# Altium PCB ATT-Light.PcbDoc
Units mm, origin at the board's own origin, x right, y up, seen from the top; angles counter-clockwise.
Board outline 140.3 x 94.24 mm, 2 copper layers (Top Layer, Bottom Layer); 110 components, 78 nets, 448 pads, 256 vias.
Unrouted connection lines stored in the file: 2.
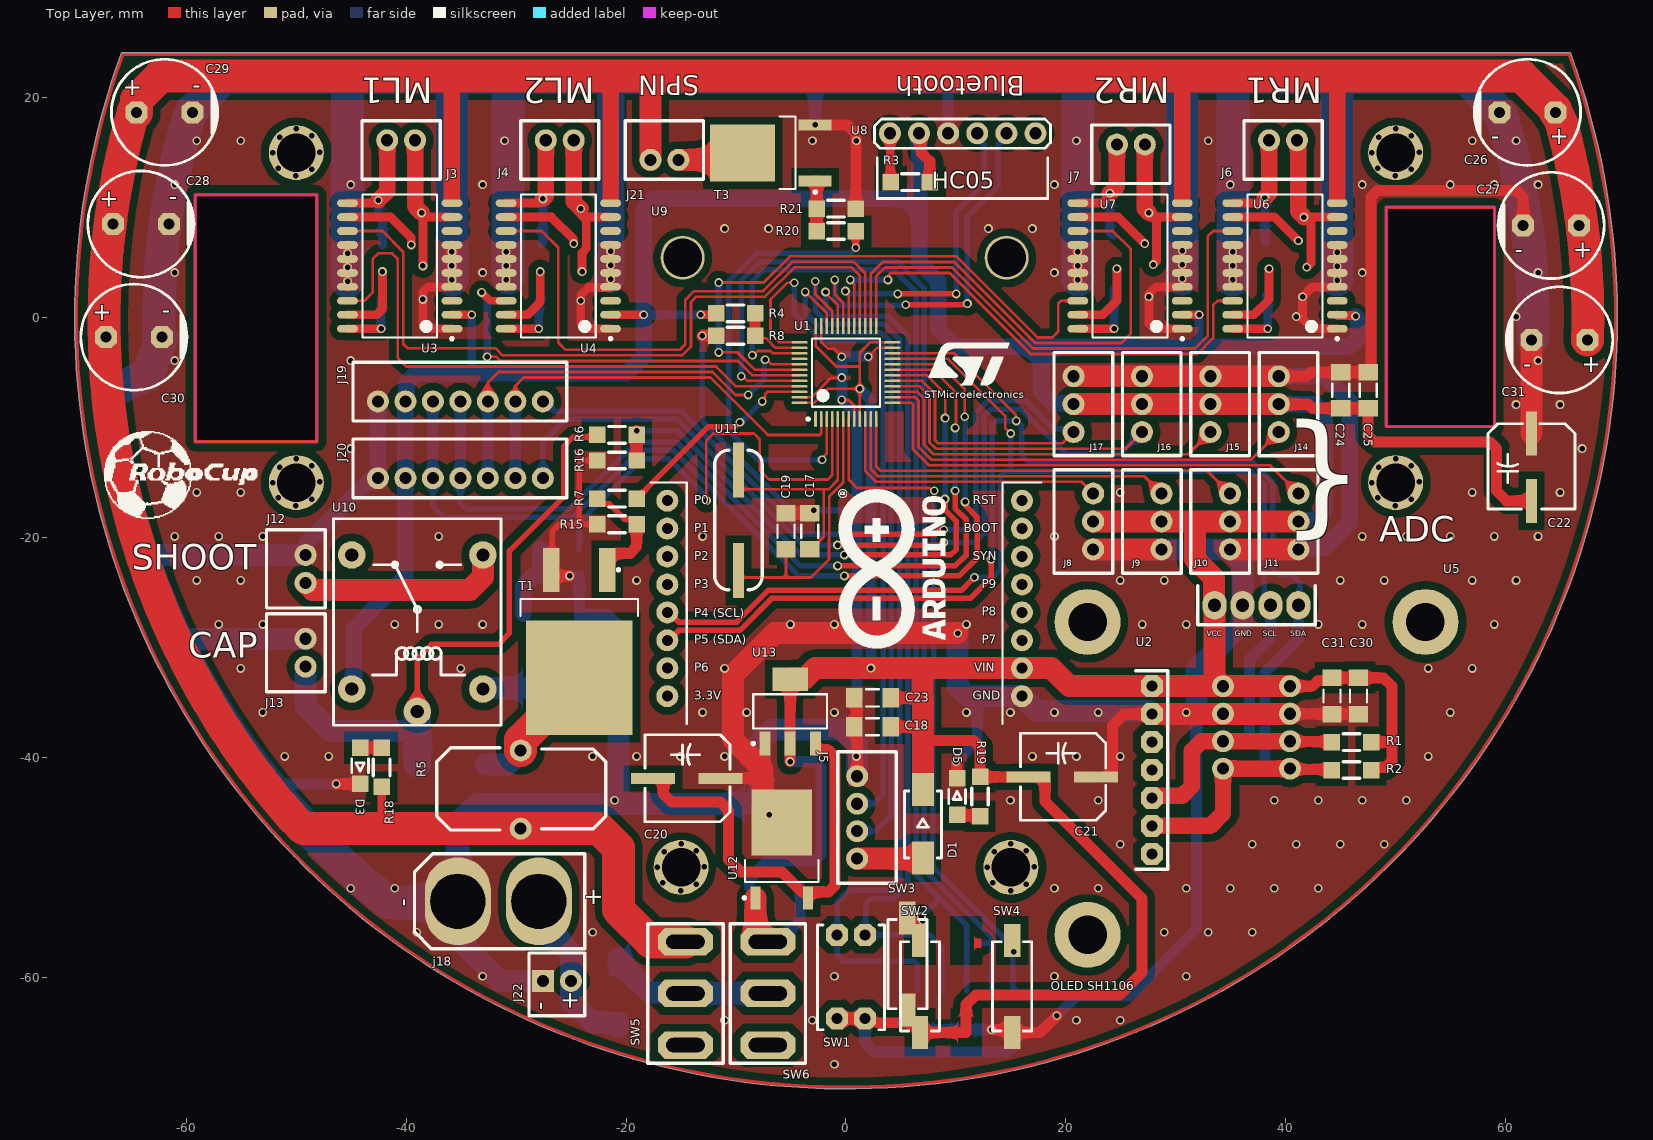
[diagram p0: Top Layer view]
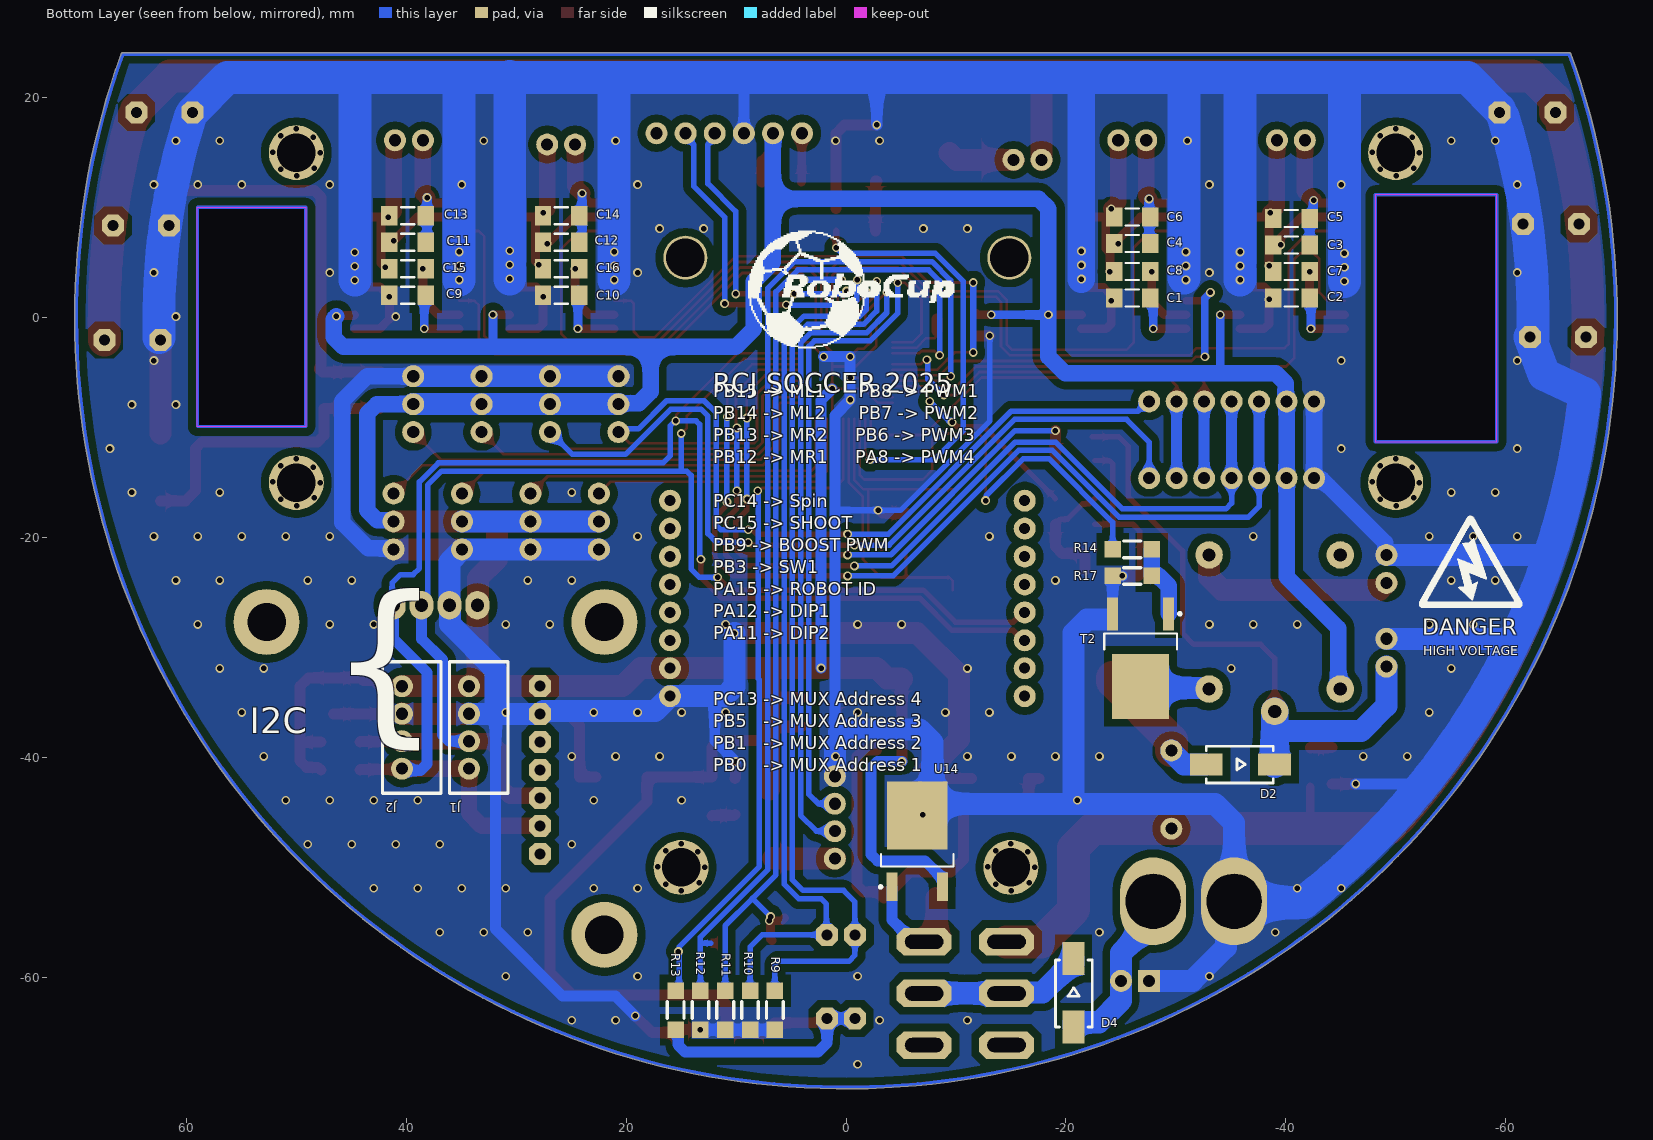
[diagram p1: Bottom Layer view, seen from below]
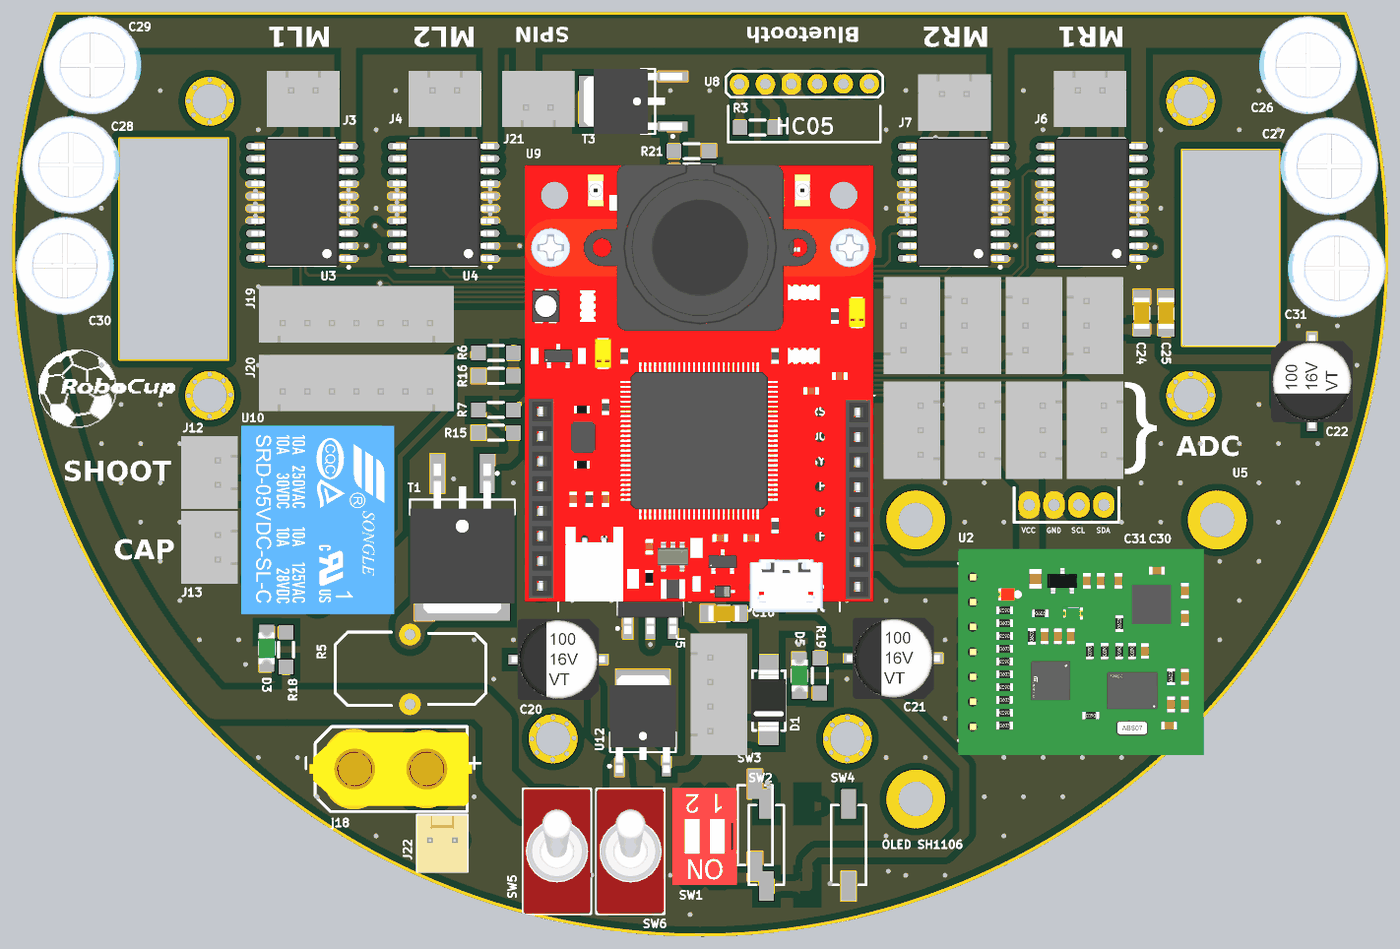
[diagram p2: 3D render of the assembled board from above, using the file's embedded part models]
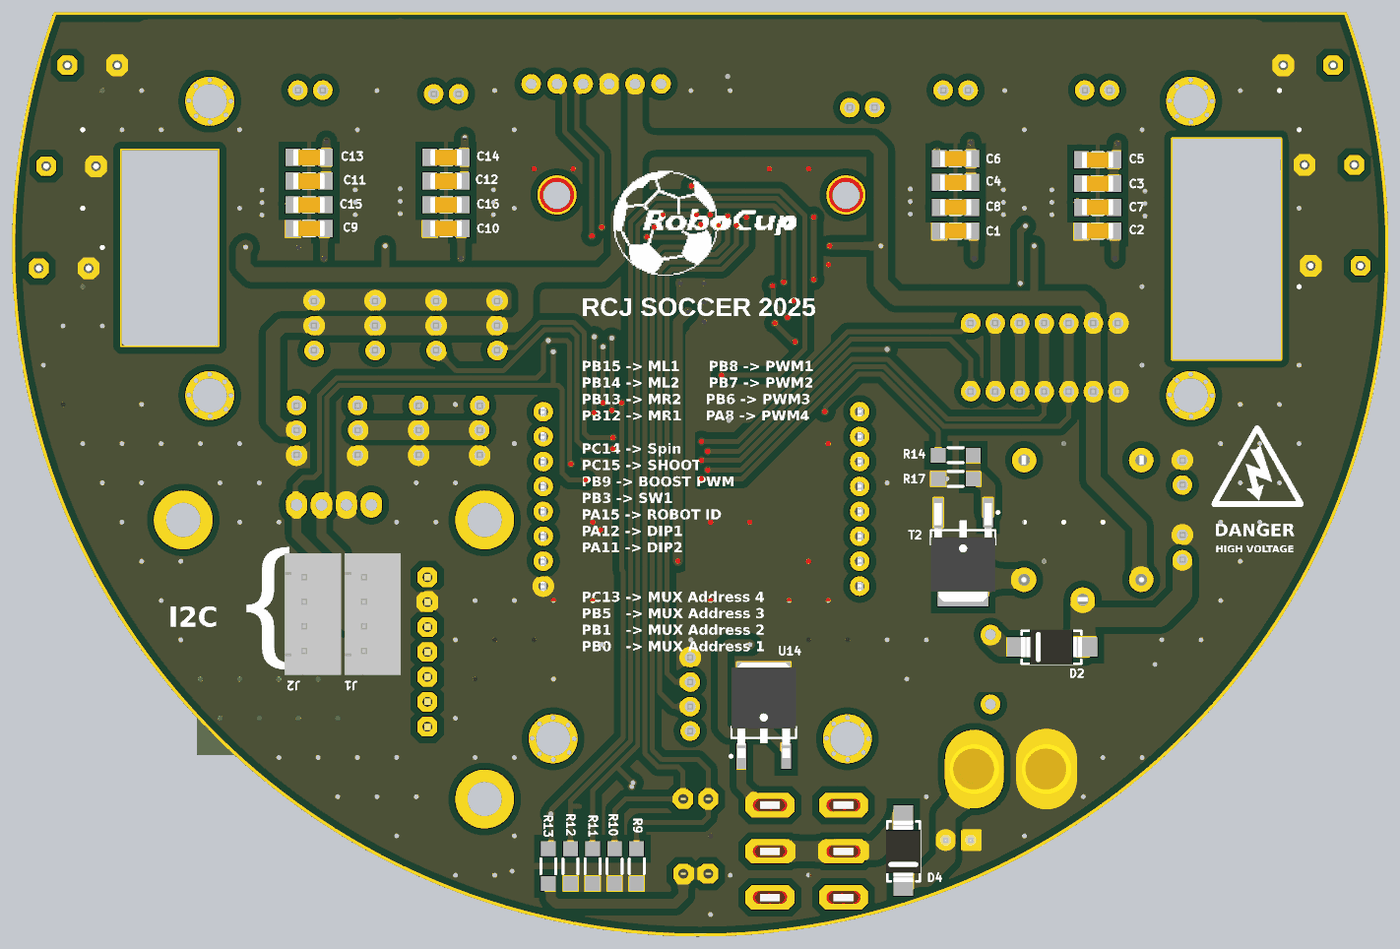
[diagram p3: 3D render of the assembled board from below, using the file's embedded part models]

## Layer stack, top to bottom
Top Solder: solder mask 0.0102, Solder Resist, Dk 3.5
Top Layer: signal copper 0.0356
Dielectric 1: dielectric 0.32, FR-4, Dk 4.8
Bottom Layer: signal copper 0.0356
Bottom Solder: solder mask 0.0102, Solder Resist, Dk 3.5

## Board outline
-65.92,23.993 ccw(c0,0) 70.15,0 ccw(c0,0) 65.92,23.993 ccw(c65.778,23.941) 65.778,24.092 -65.778,24.092 ccw(c-65.778,23.941)
cut-out: 49.149,-9.906 58.987,-9.906 58.987,10.033 49.149,10.033
cut-out: -59.182,-11.303 -59.182,11.176 -48.133,11.176 -48.133,-11.303

## Design rules (kind name [scope] priority, off if disabled: settings)
Clearance [All] p1: gap=0.7 ignorepadtopadclearanceinfootprint=FALSE except(0: Arc-Hole Track-Hole SMDPad-Hole THPad-Hole Via-Hole Fill-Hole Poly-Hole Region-Hole Text-Hole; 0.25: Arc-Arc Arc-Track Arc-SMDPad Track-Track Track-SMDPad SMDPad-SMDPad; 0.254: Arc-THPad Arc-Via Arc-Text Track-THPad Track-Via Track-Text SMDPad-THPad SMDPad-Via SMDPad-Text THPad-THPad THPad-Via THPad-Text Via-Via Via-Text Fill-Text Poly-Text Region-Text Text-Text)
ComponentClearance [All] p1 off: gap=0.254 collisioncheckmode=3 verticalgap=0.254 showdistances=FALSE
Height [All] p1 off: minheight=0 maxheight=25.4 prefheight=12.7
PlaneConnect [All] p1: planeconnectstyle=Direct reliefexpansion=0.508 reliefentries=4 reliefconductorwidth=0.254 reliefairgap=0.254
PolygonConnect [All] p1: connectstyle=Direct reliefconductorwidth=0.254 reliefentries=4 polygonreliefangle="90 Angle" airgapwidth=0.254
RoutingVias [All] p1: holewidth=0.5 width=0.8 viastyle="Through Hole" minholewidth=0.5 minwidth=0.5 maxholewidth=0.5 maxwidth=1
SolderMaskExpansion [All] p1: expansion=0.102 istentingtop=FALSE
Width [All] p1: maxlimit=5 minlimit=0.25 preferedwidth=1
27 further rules are at their usual default settings.

## Classes and differential pairs
component class ATT-Light: C1 C2 C3 C4 C5 C6 C7 C8 C9 C10 C11 C12 C13 C14 C15 C16 C17 C18 C19 C20 C21 C22 C23 C24 C25 C26 C27 C28 C29 C30 C31 D1 D2 D3 D4 D5 J1 J2 J3 J4 J5 J6 J7 J8 J9 J10 J11 J12 J13 J14 J15 J16 J17 j18 J19 J20 J21 J22 R1 R2 R3 R4 R5 R6 R7 R8 R9 R10 R11 R12 R13 R14 R15 R16 R17 R18 R19 R20 R21 SW1 SW2 SW3 SW4 SW5 SW6 T1 T2 T3 U1 U2 U3 U4 U5 U6 U7 U8 U9 U10 U11 U12 U13 U14

## Components (designator, comment, footprint, x,y, rotation, side; value= is the part's Value field where it differs from the comment)
C1 "100nF" CAP1206 -26.035,1.778 r0 bottom
C2 "100nF" CAP1206 -40.513,1.778 r0 bottom
C3 "100nF" CAP1206 -40.513,6.604 r180 bottom
C4 "100nF" CAP1206 -26.035,6.731 r180 bottom
C5 "100nF" CAP1206 -40.513,9.017 r180 bottom
C6 "100nF" CAP1206 -26.035,9.144 r180 bottom
C7 "100nF" CAP1206 -40.513,4.191 r180 bottom
C8 "100nF" CAP1206 -26.035,4.191 r180 bottom
C9 "100nF" CAP1206 39.878,2.032 r0 bottom
C10 "100nF" CAP1206 25.908,2.032 r0 bottom
C11 "100nF" CAP1206 39.878,6.858 r180 bottom
C12 "100nF" CAP1206 25.908,6.858 r180 bottom
C13 "100nF" CAP1206 39.878,9.271 r180 bottom
C14 "100nF" CAP1206 25.908,9.271 r180 bottom
C15 "100nF" CAP1206 39.878,4.445 r180 bottom
C16 "100nF" CAP1206 25.908,4.445 r180 bottom
C17 "CAP" CAP1206 -3.302,-19.431 r90 top
C18 "CAP" CAP1206 2.413,-37.211 r0 top
C19 "CAP" CAP1206 -5.461,-19.431 r90 top
C20 "CAP" "CAP SMD 100uF 16V" -14.478,-41.91 r180 top
C21 "CAP" "CAP SMD 100uF 16V" 19.685,-41.783 r180 top
C22 "CAP" "CAP SMD 100uF 16V" 62.357,-13.589 r270 top
C23 "CAP" CAP1206 2.413,-34.586 r0 top
C24 "CAP" CAP1206 44.994,-6.604 r270 top
C25 "CAP" CAP1206 47.498,-6.604 r270 top
C26 "1000uF" "CAP 5x10x13 black" 61.976,18.669 r0 top
C27 "1000uF" "CAP 5x10x13 black" 64.135,8.382 r0 top
C28 "1000uF" "CAP 5x10x13 black" -64.135,8.509 r180 top
C29 "1000uF" "CAP 5x10x13 black" -61.976,18.669 r180 top
C30 "CAP" CAP1206 46.609,-34.417 r90 top
C30 "1000uF" "CAP 5x10x13 black" -64.77,-1.778 r180 top
C31 "CAP" CAP1206 44.196,-34.417 r90 top
C31 "1000uF" "CAP 5x10x13 black" 64.897,-2.032 r0 top
D1 "DIODE" Diode 6.985,-46.101 r90 top
D2 "DIODE" Diode -35.814,-40.64 r180 bottom
D3 "LED" "LED GREEN 1206" -44.196,-40.767 r270 top
D4 "DIODE" Diode -20.701,-61.468 r90 bottom
D5 "LED" "LED GREEN 1206" 10.109,-43.561 r90 top
J1 "XH4" "XH 4PIN" 33.401,-37.281 r270 bottom
J2 "XH4" "XH 4PIN" 39.497,-37.281 r270 bottom
J3 "XH2" "XH 2pin" -40.462,15.24 r180 top
J4 "XH2" "XH 2pin" -26.035,15.24 r180 top
J5 "XH4" "XH 4PIN" 1.905,-45.466 r270 top
J6 "XH2" "XH 2pin" 39.751,15.24 r180 top
J7 "XH2" "XH 2pin" 25.908,14.859 r180 top
J8 "XH3" "XH 3PIN" 21.59,-18.542 r90 top
J9 "XH3" "XH 3PIN" 27.813,-18.542 r90 top
J10 "XH3" "XH 3PIN" 34.036,-18.542 r90 top
J11 "XH3" "XH 3PIN" 40.259,-18.542 r90 top
J12 "XH2" "XH 2pin" -50.038,-22.86 r90 top locked
J13 "XH2" "XH 2pin" -50.038,-30.48 r90 top locked
J14 "XH3" "XH 3PIN" 40.251,-7.874 r270 top
J15 "XH3" "XH 3PIN" 34.03,-7.874 r270 top
J16 "XH3" "XH 3PIN" 27.81,-7.874 r270 top
J17 "XH3" "XH 3PIN" 21.59,-7.874 r270 top
j18 "XT60" XT60 -30.099,-53.086 r270 top
J19 "XH7" "XH 7PIN" -35.052,-9.144 r0 top
J20 "XH7" "XH 7PIN" -35.052,-16.129 r0 top
J21 "XH2" "XH 2pin" -16.51,15.24 r0 top
J22 "H2" "H2 MOLEX" -26.289,-60.706 r270 top
R1 "10K" RES1206 45.974,-38.608 r0 top
R2 "10K" RES1206 45.974,-41.148 r0 top
R3 "RES" RES1206 5.842,12.319 r180 top
R4 "10K" RES1206 -10.033,0.381 r180 top
R5 "100mH" inductor -29.718,-42.926 r90 top locked
R6 "10K" RES1206 -20.828,-10.666 r180 top
R7 "100" RES1206 -20.828,-16.468 r180 top
R8 "10K" RES1206 -10.033,-1.651 r0 top
R9 "10K" RES1206 6.477,-62.992 r270 bottom
R10 "10K" RES1206 8.731,-62.992 r270 bottom
R11 "10K" RES1206 10.983,-62.992 r270 bottom
R12 "10K" RES1206 13.237,-62.992 r270 bottom
R13 "10K" RES1206 15.491,-62.992 r90 bottom
R14 "100" RES1206 -26.035,-21.082 r0 bottom
R15 "10K" RES1206 -20.828,-18.796 r0 top
R16 "10K" RES1206 -20.828,-12.997 r0 top
R17 "10K" RES1206 -26.035,-23.498 r0 bottom
R18 "1K" RES1206 -42.228,-40.913 r270 top
R19 "1K" RES1206 12.192,-43.561 r90 top
R20 "100" RES1206 -0.889,7.874 r0 top
R21 "10K" RES1206 -0.889,9.906 r0 top
SW1 "DIP" "DIP Switch 2" 0.457,-60.071 r90 top
SW2 "Switch" pushbutton 6.731,-60.833 r90 top
SW3 "Switch" pushbutton 5.588,-58.801 r90 top
SW4 "Switch" pushbutton 15.113,-60.833 r90 top
SW5 "SW" "SPDT Switch" -14.732,-61.468 r0 top
SW6 "SW" "SPDT Switch" -7.239,-61.468 r0 top
T1 "IRF540" IRF540S -24.257,-29.591 r270 top
T2 "FDD" FDD6690A -26.797,-30.988 r270 bottom
T3 "FDD" FDD6690A -6.848,14.986 r180 top
U1 "STM32F103C8T6" STM32F103C8T6 0,-5 r90 top locked
U2 "TDAxis12" TDAxis12 38.906,-41.143 r270 top locked
U3 "L6201" L6201 -40.589,4.699 r180 top locked
U4 "L6201" L6201 -26.162,4.699 r180 top locked
U5 "OLED" "OLED SH1106" 37.338,-41.91 r0 top locked
U6 "L6201" L6201 39.929,4.699 r180 top locked
U7 "L6201" L6201 25.834,4.699 r180 top locked
U8 "BT" HC05 10.597,11.464 r0 top
U9 "OpenMV" OpenMV 0,-15 r0 top locked
U10 "RELAY" "Relay 5V 10A" -38.989,-27.686 r270 top locked
U11 "Oscilator" "Crystal Oscilator" -9.779,-18.415 r90 top
U12 "7805" "7805 (SOT-252)" -5.842,-48.387 r90 top
U13 "1117" AMS1117 -5.08,-35.814 r90 top
U14 "LF33" LF33 -6.477,-47.625 r90 bottom
? "Comment" SCREW -50,-15 r0 top locked
? "Comment" SCREW -50,15 r0 top locked
? "Comment" SCREW -15,-50 r0 top locked
? "Comment" SCREW 15,-50 r0 top locked
? "Comment" SCREW 50,-15 r0 top locked
? "Comment" SCREW 50,15 r0 top locked

## Footprints (in the part's own frame and the unit in brackets; to place one, negate y for a bottom-side part, rotate by r counter-clockwise, add the part's x,y. Pads: shape width x height; smd on the part's side, far side on the other; paste and mask are expansions set on the pad)
"7805 (SOT-252)" [mm] "D-PAK, 3-Pads, Body 6.25x6.71mm (max), IPC Medium Density"
  rect 2.1x0.9 smd: 1(-4.4,2.4) 3(-4.4,-2.4)
  rect 6x5.5 smd: 4(2.45,0)
  silkscreen extent -4.52,-3.35 -0.95,3.52, body extent -5.06,-3.35 4.85,3.35, height 2.45
AMS1117 [mm] "SOT223, 4-Leads, Body 6.30x7.00mm (avg), Pitch 2.30mm, IPC Medium Density"
  rect 2.15x1 smd: 1(-2.925,2.3) 2(-2.925,0) 3(-2.925,-2.3)
  rect 2.15x3.25 smd: 4(2.925,0)
  silkscreen extent -3.05,-3.35 1.55,3.47, body extent -3.5,-3.35 3.5,3.35, height 1.65
CAP1206 [mm] "Chip Capacitor, 2-Leads, Body 3.20x1.60mm, IPC Medium Density"
  rect 1.5x1.75 smd: 1(-1.651,0) 2(1.651,0)
  silkscreen extent -0.6,-0.77 0.6,0.77, body extent -1.6,-0.8 1.6,0.8, height 1
"CAP 5x10x13 black" [mm]
  oct 2x2 hole 1: 1(-2.54,0) 2(2.54,0)
  silkscreen extent -4.83,-4.83 4.83,4.83, body extent -5,-5 5,5, height 13.1
"CAP SMD 100uF 16V" [mm]
  rect 4x1 smd: 1(-3.048,0) 2(3.07,0.003)
  silkscreen extent -3.94,-3.97 3.81,3.94, body extent -4.75,-4.15 4.75,4.15, height 10.51
"Crystal Oscilator" [mm]
  rect 5x1 smd: 1(-4.572,0) 2(4.572,0)
  silkscreen extent -6.35,-2.16 6.35,2.16, body extent -6.5,-2.35 6.5,2.35, height 4.21
Diode [mm]
  rect 3x2 smd: 1(-3.048,0) 2(3.175,0)
  silkscreen extent -3.06,-1.69 3.05,1.65, body extent -3.12,-1.78 3.12,1.78, height 2.26
"DIP Switch 2" [mm]
  oct 2x2 hole 1: 1(-3.683,1.27) 2(-3.683,-1.27) 3(3.937,1.27) 4(3.937,-1.27)
  silkscreen extent -4.7,-3.05 4.83,3.05, body extent -4.83,-3.3 5.07,3.3, height 6.8
FDD6690A [mm] "D-PAK, 3-Pads, Body 5.85x6.66mm (max), IPC Medium Density"
  rect 3x1 smd: 1(-4.05,2.54) 3(-4.05,-2.54)
  rect 5.9x5.2 smd: 4(2.55,0)
  silkscreen extent -4.17,-3.3 -0.8,3.69, body extent -5,-3.3 5,3.3, height 3.03
"H2 MOLEX" [mm]
  round 2 hole 1.1: 1(-0.381,1.27)
  rect 2x2 hole 1.1: 2(-0.381,-1.27)
  silkscreen extent -2.92,-2.54 2.79,2.54, body extent -2.9,-2.54 2.9,2.54, height 11.24
HC05 [mm]
  round 2 hole 1.1: 1(-6.605,5.3) 2(-3.956,5.3) 3(-1.308,5.3) 4(1.341,5.3) 5(3.99,5.3) 6(6.639,5.3)
  silkscreen extent -8,-0.64 8,6.6, body extent -8,-1 8,5.55, height 39.5
inductor [mm]
  round 2 hole 1.1: 1(-3.556,-0.127) 2(3.556,-0.127)
  silkscreen extent -3.68,-7.87 3.81,7.49, body extent -4.15,-8.42 4.15,8.17, height 16.29
IRF540S [mm] "D2-PAK, 3-Pads, Body 7.93x8.70mm (max), IPC Medium Density"
  rect 4x1.5 smd: 1(-6.65,2.54) 3(-6.65,-2.54)
  rect 10.4x9.7 smd: 4(3.15,0)
  silkscreen extent -6.77,-5.35 -2.45,5.35, body extent -7.65,-5.33 7.6,5.33, height 5.08
L6201 [mm] "SOP, 20-Leads, Body 12.80x7.50mm, Pitch 1.27mm, IPC Medium Density"
  oval 1.9x0.7 smd: 1(-4.75,5.715) 2(-4.75,4.445) 3(-4.75,3.175) 4(-4.75,1.905) 5(-4.75,0.635) 6(-4.75,-0.635) 7(-4.75,-1.905) 8(-4.75,-3.175) 9(-4.75,-4.445) 10(-4.75,-5.715) 11(4.75,-5.715) 12(4.75,-4.445) 13(4.75,-3.175) 14(4.75,-1.905) 15(4.75,-0.635) 16(4.75,0.635) 17(4.75,1.905) 18(4.75,3.175) 19(4.75,4.445) 20(4.75,5.715)
  silkscreen extent -4.88,-6.5 3.4,6.74, body extent -5.16,-6.5 5.16,6.5, height 2.5
"LED GREEN 1206" [mm]
  rect 1.5x1.5 smd: 1(-1.651,0) 2(1.651,0)
  silkscreen extent -0.64,-0.76 0.64,0.76, body extent -1.63,-0.83 1.64,0.82, height 0.9
LF33 [mm] "D-PAK, 3-Pads, Body 6.20x6.66mm (max), IPC Medium Density"
  rect 2.6x1 smd: 1(-4.15,2.28) 3(-4.15,-2.28)
  rect 6.2x5.5 smd: 4(2.35,0)
  silkscreen extent -4.27,-3.3 -1.15,3.46, body extent -4.32,-3.3 5.4,3.3, height 2.5
"OLED SH1106" [mm]
  oval 2.2x2.6 hole 1.2: 1(-3.81,15.748) 2(-1.27,15.748) 3(1.27,15.748) 4(3.81,15.748)
  round 6 hole 3.5: ""(-15.367,14.224) ""(-15.365,-14.23) ""(15.367,14.224)
  silkscreen extent -5.33,13.97 5.33,17.53, body extent -18,-17 18,17, height 11.6
OpenMV [mm]
  round 2 hole 1: 1(-16.256,-1.651) 2(-16.256,-4.191) 3(-16.256,-6.731) 4(-16.256,-9.271) 5(-16.256,-11.811) 6(-16.256,-14.351) 7(-16.256,-16.891) 8(-16.256,-19.431) 9(16.002,-19.431) 10(16.002,-16.891) 11(16.002,-14.351) 12(16.002,-11.811) 13(16.002,-9.271) 14(16.002,-6.731) 15(16.002,-4.191) 16(16.002,-1.651)
  round 4 hole 3.5: 17(14.605,20.447) 18(-14.859,20.447)
  silkscreen extent -17.78,-21.97 17.78,0, body extent -17.92,-22.12 17.9,23.58, height 38.95
pushbutton [mm]
  rect 3x1.5 smd: 1(-4.191,0) 2(4.191,0)
  silkscreen extent -4.06,-1.78 4.06,1.78, body extent -4.17,-1.82 4.17,1.82, height 4.25
"Relay 5V 10A" [mm]
  round 2.5 hole 1.2: 1(-6.096,5.969) 2(-6.096,-5.969) 3(6.096,-5.969) 4(6.096,5.969) 5(8.128,0)
  silkscreen extent -9.4,-7.62 9.4,7.62, body extent -9.6,-7.8 9.6,7.8, height 15.9
RES1206 [mm]
  rect 1.5x1.5 smd: 1(-1.778,0) 2(1.778,0)
  silkscreen extent -0.76,-0.76 0.76,0.76, body extent -1.58,-0.82 1.58,0.82, height 0.53
SCREW [mm]
  round 5 hole 3.5: 1(0,0)
  round 0 hole 0.5: ""(-2.159,0) ""(-1.651,-1.397) ""(-1.524,1.397) ""(-0.031,-2.11) ""(0,2.159) ""(1.397,-1.524) ""(1.397,1.524) ""(2.128,0.059)
"SPDT Switch" [mm]
  oct 5x2.5 hole 1.3 slot 3.5 at 0 deg: 1(0.127,4.699) 2(0.127,0) 3(0.127,-4.699)
  silkscreen extent -3.3,-6.35 3.56,6.35, body extent -3.3,-6.35 3.56,6.35, height 28.65
STM32F103C8T6 [mm] "TSQFP, 48-Leads, Body 7.00x7.00mm, Pitch 0.50mm, IPC Medium Density"
  oval 1.45x0.254 smd: 1(-4.224,2.762)
  oval 1.45x0.25 smd: 2(-4.225,2.25) 3(-4.225,1.75) 4(-4.225,1.25) 5(-4.225,0.75) 6(-4.225,0.25) 7(-4.225,-0.25) 8(-4.225,-0.75) 9(-4.225,-1.25) 10(-4.225,-1.75) 11(-4.225,-2.25) 12(-4.225,-2.75) 25(4.225,-2.75) 26(4.225,-2.25) 27(4.225,-1.75) 28(4.225,-1.25) 29(4.225,-0.75) 30(4.225,-0.25) 31(4.225,0.25) 32(4.225,0.75) 33(4.225,1.25) 34(4.225,1.75) 35(4.225,2.25) 36(4.225,2.75)
  oval 0.25x1.45 smd: 13(-2.75,-4.225) 14(-2.25,-4.225) 15(-1.75,-4.225) 16(-1.25,-4.225) 17(-0.75,-4.225) 18(-0.25,-4.225) 19(0.25,-4.225) 20(0.75,-4.225) 21(1.25,-4.225) 22(1.75,-4.225) 23(2.25,-4.225) 24(2.75,-4.225) 37(2.75,4.225) 38(2.25,4.225) 39(1.75,4.225) 40(1.25,4.225) 41(0.75,4.225) 42(0.25,4.225) 43(-0.25,4.225) 44(-0.75,4.225) 45(-1.25,4.225) 46(-1.75,4.225) 47(-2.25,4.225) 48(-2.75,4.225)
  silkscreen extent -4.35,-3.1 3.1,3.57, body extent -4.5,-4.5 4.5,4.5, height 1.6
TDAxis12 [mm]
  oct 2x2 hole 1: 1(-7.615,-11.093) 2(-5.075,-11.093) 3(-2.536,-11.093) 4(0.004,-11.093) 5(2.544,-11.093) 6(5.084,-11.093) 7(7.624,-11.093)
  silkscreen extent -9.02,-12.57 9.02,-9.65, body extent -10.5,-12.57 10.5,12.43, height 5.39
"XH 2pin" [mm]
  round 2 hole 1.1: 1(-1.27,-0.889) 2(1.27,-0.889)
  silkscreen extent -3.56,-2.67 3.56,2.67, body extent -3.7,-2.88 3.7,2.88, height 7
"XH 3PIN" [mm]
  round 2 hole 1.1: 1(-2.54,-0.889) 2(0,-0.889) 3(2.54,-0.889)
  silkscreen extent -4.7,-2.67 4.7,2.67, body extent -4.95,-2.88 4.95,2.88, height 7
"XH 4PIN" [mm]
  round 2 hole 1.1: 1(-3.753,-0.889) 2(-1.253,-0.889) 3(1.247,-0.889) 4(3.747,-0.889)
  silkscreen extent -5.97,-2.67 5.97,2.67, body extent -6.2,-2.88 6.2,2.88, height 7
"XH 7PIN" [mm]
  round 2 hole 1.1: 1(-7.523,1.524) 2(-5.023,1.524) 3(-2.523,1.524) 4(-0.023,1.524) 5(2.477,1.524) 6(4.977,1.524) 7(7.477,1.524)
  silkscreen extent -9.78,-0.25 9.65,5.08, body extent -9.95,-0.46 9.95,5.29, height 7
XT60 [mm]
  oval 8x6 hole 5: 1(0,2.159) 2(0,-5.207)
  silkscreen extent -4.32,-9.14 4.32,6.35, body extent -3.75,-9.72 3.75,6.83, height 16

## Part data
C1 C2 C3 C4 C5 C6 C7 C8 C9 C10 C11 C12 C13 C14 C15 C16 C17 C18 C19 C23 C24 C25 C30 C31: library part CAP1206, "Capacitor SMD 1206"
C20 C21 C22: library part "CAP Electrolit SMD", "Capacitor Electrolit SMD"
C26 C27 C28 C29 C30 C31: library part "Cap Electrolyte", "CAP DIP"
D1 D2 D4: library part Diode
D3 D5: library part "LED SMD 1206", "LED SMD 1206"
J1 J2 J5: library part "XH 4PIN", "XH Connector 4pins"
J3 J4 J6 J7 J12 J13 J21: library part "XH 2PIN", "XH Connector 2pins"
J8 J9 J10 J11 J14 J15 J16 J17: library part "XH 3PIN", "XH Connector 3pins"
j18: "XT60 Power Connector"
J19 J20: library part "XH 7Pin", "XH Connector 7pins"
J22: library part "H2 MOLEX", "molex connector"
R1 R2 R3 R4 R6 R7 R8 R9 R10 R11 R12 R13 R14 R15 R16 R17 R18 R19 R20 R21: library part RES1206, "RESISTOR SMD"
R5: library part inductor, "SELF INDUCTOR"
SW1: library part "DIP SW 2", "DIP Switch 2 pin"
SW2 SW3 SW4: library part pushbutton, "Switch SMD Tact"
SW5 SW6: library part "SPDT Switch", "SPDT Power Switch"
T1: library part IRF540S, "IRF-540 MOSFET N-Chanel"
T2 T3: library part FDD6690A, "FDD6690A MOSFET N-Chanel"
U1: "STM32F103C8T6 / LQFP48"
U2: "Gyroscpoe Sensor"
U5: library part "OLED SH1106", "OLED SH1106 1.3inch"
U8: library part HC05, "Bluetooth HC05 Module"
U9: "OpenMV Camera H7 R2"
U10: library part "Relay 5V 10A"
U11: library part Crystal, "Crystal Oscilator 8MHz"
U12: library part "7805 (SOT-252)", "5v Regulator"
U13: library part AMS1117, "3.3v Regulator"
U14: "3.3V Regulator"

## Via types
v1: diameter 0.8, hole 0.5, Top Layer to Bottom Layer, tented both sides, 256 vias

## Nets (pads, with @x,y where several pads share a name; then routed paths per layer and width w, separated by ;. In a path a pad name is that pad's centre, name@x,y a point inside that pad or via, vN(x,y) a via of type N, cw(c..) or ccw(c..) an arc to the next point about the centre after c; other vN are vias at no path point)
+12: C26.2 C27.2 C28.2 C29.2 C30.2@-67.31,-1.778 C31.2@67.437,-2.032 J21.1 R5.1 R18.2 SW5.1 U3.10 U4.10 U6.10 U7.10 | length 322.3
  Top Layer w0.8: -42.291,-46.482 -42.228,-46.419 R18.2 ; -35.839,21.819 -35.687,21.971 ; -21.463,21.971 -21.412,21.92 ; 30.584,21.948 30.607,21.971 ; 44.679,21.819 44.831,21.971
  Top Layer w1.5: -35.839,10.795 -35.839,21.819 ; -21.412,10.795 -21.412,21.92 ; 30.584,10.795 30.584,21.948 ; 44.679,10.795 44.679,21.819
  Top Layer w2: J21.1 -17.78,21.844 ; -16.129,21.844 -16.002,21.971
  Top Layer w3: C29.2@-64.785,18.841 ccw(c0.932,-0.197) -50.369,-45.467 ccw(c0.932,-0.197) -50.306,-45.538 -50.241,-45.603 -49.362,-46.482 R5.1 -22.458,-46.482 -20.701,-48.239 -20.701,-53.848 -17.78,-56.769 SW5.1 ; C29.2 -64.516,19.833 -62.378,21.971 -35.687,21.971 -21.463,21.971 -16.002,21.971 30.607,21.971 44.831,21.971 61.468,21.971 C26.2@64.516,18.923 ; C26.2 64.521,18.665 64.578,18.593 cw(c62.225,16.733) 65.118,17.526 cw(c1.164,0.026) C31.2@67.437,-2.032
ADC0: J8.3 U1.10 | length 26.3
  Top Layer w0.25: U1.10 1.75,-13.959 2.721,-14.93 21.407,-14.93 J8.3
ADC1: J9.3 U1.11 | length 31.9
  Top Layer w0.25: U1.11 2.25,-13.752 2.928,-14.43 5.358,-14.43 27.13,-14.43 J9.3
ADC2: J10.3 U1.12 | length 37.5
  Top Layer w0.25: U1.12 2.75,-13.545 3.135,-13.93 32.853,-13.93 J10.3
ADC3: J11.3 U1.13 | length 42.7
  Top Layer w0.25: U1.13 5.95,-7.75 6.096,-7.896 6.096,-10.414 6.096,-11.972 7.554,-13.43 9.112,-13.43 38.576,-13.43 J11.3
ADC4: J14.3 U1.14 | length 41
  Top Layer w0.25: U1.14 6.303,-7.25 6.596,-7.543 6.596,-10.207 6.596,-11.765 7.761,-12.93 9.319,-12.93 36.846,-12.93 J14.3
ADC5: J15.3 U1.15 | length 34.6
  Top Layer w0.25: U1.15 6.51,-6.75 7.096,-7.336 7.096,-10 7.096,-11.558 7.968,-12.43 9.526,-12.43 31.125,-12.43 J15.3
ADC6: J16.3 J20.7 U1.16 | length 105.5
  Top Layer w0.25: U1.16 6.717,-6.25 7.596,-7.129 7.596,-11.351 8.175,-11.93 25.405,-11.93 J16.3
  Top Layer w0.5: v1(-0.762,-20.686) 8.57,-20.686 8.809,-20.447 v1(8.89,-20.447)
  Bottom Layer w0.5: J20.7 -27.575,-11.319 -25.515,-9.259 -15.341,-9.259 -3.914,-20.686 v1(-0.762,-20.686) ; v1(8.89,-20.447) 11.756,-20.447 12.561,-19.642 12.561,-8.96 13.208,-8.313 15.933,-8.313 20.066,-12.446 24.889,-12.446 J16.3
ADC7: J17.3 J19.7 U1.17 | length 87.2
  Top Layer w0.25: U1.17 6.924,-5.75 8.096,-6.922 8.096,-11.144 8.382,-11.43 19.685,-11.43 J17.3
  Top Layer w0.5: v1(-0.138,-19.685) 8.128,-19.685 8.452,-19.361 8.833,-19.361 v1(8.89,-19.304)
  Bottom Layer w0.5: J19.7 -27.422,-7.62 -26.533,-8.509 -15.031,-8.509 -3.855,-19.685 v1(-0.138,-19.685) ; v1(8.89,-19.304) 11.375,-19.304 11.811,-18.868 11.811,-8.65 12.897,-7.563 16.326,-7.563 18.89,-10.127 20.414,-10.127 J17.3
ADC8: R6.1 R16.2 U1.18 | length 56.6
  Top Layer w0.25: U1.18 7.365,-5.25 9.017,-6.902 v1(9.017,-9.144)
  Top Layer w0.5: v1(-0.138,-21.59) 9.525,-21.59 10.033,-21.082 10.033,-18.534 9.017,-17.518 9.017,-16.525 v1(9.002,-16.51)
  Top Layer w1: R16.2 R6.1 ; R6.1@-19.05,-10.541 v1(-19.05,-10.287)
  Bottom Layer w0.5: v1(-19.05,-10.287) -15.374,-10.287 -4.071,-21.59 v1(-0.138,-21.59) ; v1(9.002,-16.51) 9.009,-16.502 9.009,-9.152 v1(9.017,-9.144)
BOOST_CTRL: R7.1 U1.46 | length 19.1
  Top Layer w0.25: v1(-7.62,-7.62) -7.62,-7.471 -7.338,-7.189 -7.338,-6.957 -7.131,-6.75 U1.46
  Top Layer w0.5: R7.1 -12.488,-9.906 -10.095,-9.906 -9.714,-9.525 v1(-9.652,-9.525)
  Bottom Layer w0.5: v1(-9.652,-9.525) -9.571,-9.525 -9.386,-9.341 -9.341,-9.341 v1(-7.62,-7.62)
BOOT0: R12.1 SW3.2 U1.44 | length 101.4
  Top Layer w0.25: v1(-9.525,-5.334) -9.376,-5.334 -8.96,-5.75 U1.44
  Top Layer w0.8: SW3.2 5.842,-54.864 v1(6.985,-54.864)
  Bottom Layer w0.5: v1(-9.525,-5.334) -9.525,3.384 -7.817,5.092 4.687,5.092 7.124,2.655 7.124,-50.232 13.237,-56.345 13.237,-57.023 ; 12.319,-56.896 13.11,-56.896 13.237,-57.023 ; R12.1 13.237,-57.023
DIP1: R10.1 SW1.4 U1.32 | length 82.3
  Top Layer w0.25: v1(-1.862,2.329) -1.862,2.243 -0.75,1.131 U1.32
  Bottom Layer w0.5: v1(-1.862,2.329) -1.862,0.719 -1.27,0.127 3.81,0.127 5.624,-1.687 5.624,-51.526 4.303,-52.847 2.271,-52.847 1.778,-53.34 1.778,-56.083 SW1.4 7.62,-56.134 8.731,-57.245 R10.1
DIP2: R9.1 SW1.3 U1.33 | length 86.7
  Top Layer w0.25: v1(-2.794,3.302) -2.794,2.159 -1.25,0.615 U1.33
  Bottom Layer w0.5: v1@-2.794,3.294 -2.794,0.59 -1.581,-0.623 3.499,-0.623 4.874,-1.998 4.874,-51.133 3.91,-52.097 0.227,-52.097 -0.813,-53.137 SW1.3 -0.813,-57.988 -0.254,-58.547 6.223,-58.547 6.477,-58.801 R9.1
GND: C1.2 C2.2 C9.2 C10.2 C17.2 C18.1 C19.2 C20.1 C21.1 C22.1 C23.1 C24.1 C25.1 C26.1 C27.1 C28.1 C29.1 C30.1 C31.1 D3.2 D5.2 J1.2 J2.2 J5.1 J8.1 J9.1 J10.1 J11.1 J12.2 J13.2 J14.1 J15.1 J16.1 J17.1 j18.2 J19.1 J20.1 J22.2 R8.1 R9.2 R10.2 R11.2 R12.2 R15.1 R16.1 R17.2 R21.2 SW4.1 T1.3 T2.3 T3.3 U1.8 U1.23 U1.35 U1.47 U2.2 U3.1 U3.4 U3.5 U3.6 U3.7 U3.14 U3.15 U3.16 U3.17 U4.1 U4.4 U4.5 U4.6 U4.7 U4.14 U4.15 U4.16 U4.17 U5.2 U6.1 U6.4 U6.5 U6.6 U6.7 U6.14 U6.15 U6.16 U6.17 U7.1 U7.4 U7.5 U7.6 U7.7 U7.14 U7.15 U7.16 U7.17 U8.3 U9.9 U12.4 U13.1 U14.4 | length 1026.9
  Top Layer w0.25: U1.47 -3.131,-7.25 -1.342,-5.461 v1(-0.381,-5.461) ; U1.35 -2.25,-2.195 -1.622,-2.823 -1.114,-2.823 v1(-0.381,-3.556) ; v1(-0.381,-7.493) 0.254,-7.493 0.75,-7.989 U1.8 ; v1(2.032,-3.556) 2.838,-2.75 U1.23
  Top Layer w0.5: T1.3 -26.729,-22.873 -26.729,-19.441 -26.084,-18.796 -24.257,-18.796 ; R15.1 -24.257,-18.796 ; R16.1 -23.964,-12.997 -24.257,-13.29 -24.257,-18.796
  Top Layer w0.8: U3.17 v1(-45.339,3.302) U3.16 v1(-45.339,4.572) U3.15 v1(-45.339,5.842) U3.14 ; U3.1 -38.012,-1.016 -38.481,-0.547 v1(-38.481,1.651) -38.481,2.325 -38.012,2.794 U3.4 v1(-35.839,3.429) U3.5 U3.6 U3.7 ; U4.17 v1(-30.912,3.429) U4.16 v1(-30.912,4.699) U4.15 v1(-30.912,5.969) U4.14 ; U4.1 -23.661,-1.016 -24.13,-0.547 v1(-24.13,1.524) -24.13,2.032 -23.418,2.744 -21.462,2.744 U4.4 v1(-21.412,3.505) U4.5 v1(-21.412,4.775) U4.6 v1(-21.412,6.045) U4.7 ; U7.17 U7.16 U7.15 U7.14 ; U7.1 28.028,-1.016 27.559,-0.547 v1(27.559,1.905) 27.559,2.159 28.194,2.794 U7.4 v1(30.584,3.533) U7.5 v1(30.584,4.803) U7.6 v1(30.584,6.073) U7.7 ; U6.17 v1(35.179,3.429) U6.16 v1(35.179,4.699) U6.15 v1(35.179,5.969) U6.14 ; U6.1 42.418,-1.016 41.529,-0.127 v1(41.529,1.905) 42.418,2.794 U6.4 v1(44.679,3.404) U6.5 v1(44.679,4.674) U6.6 v1(44.679,5.944) U6.7
  Top Layer w1: v1(-46.355,-42.418) D3.2 ; T1.3 -26.797,-23.245 -26.547,-23.495 v1(-25.146,-23.495) ; v1(-13.081,-1.651) R8.1 ; C20.1 -7.592,-41.91 -7.38,-41.91 U13.1 ; C19.2 C17.2 ; v1(-2.798,17.526) 0.127,17.526 0.889,16.764 R21.2 ; C23.1 0.762,-34.711 1.016,-34.965 J5.1 ; v1(10.033,-40.386) 10.033,-41.834 D5.2 ; v1(13.237,-64.77) 14.863,-64.77 15.113,-65.02 SW4.1 17.653,-65.024 v1(19.177,-63.5) ; C21.1 24.233,-41.783 24.233,-37.108 25.273,-36.068 U2.2 ; J14.1 41.935,-5.334 42.316,-4.953 C24.1 C25.1 ; J2.2 40.406,-36.048 46.589,-36.048 C30.1@46.609,-36.068 ; C25.1@47.502,-4.953 C25.1 ; C25.1@47.752,-4.703 47.752,10.971 48.338,11.557 61.009,11.557 61.595,10.971 C27.1 ; C25.1@47.873,-4.578 47.873,-4.703 47.623,-4.953 C25.1
  Top Layer w2: U12.4 -7.592,-44.187 -7.592,-41.91 -7.592,-41.049 -10.287,-38.354 -10.287,-32.512 -6.477,-28.702 v1(10.16,-28.702) ; J17.1 J16.1 J15.1 J14.1 ; J8.1 J9.1 ; U2.2 40.346,-36.068 J2.2 ; J10.1 J11.1 ; C22.1 C31.1@62.357,-2.032
  Top Layer w3: j18.2@-35.433,-53.213 j18.2
  Bottom Layer w0.5: v1(-13.081,-1.651) -13.081,-9.398 -4.953,-17.526 v1(-2.921,-17.526)
  Bottom Layer w0.6: v1(-2.921,-17.526) 1.016,-17.526
  Bottom Layer w1: -52.815,-42.075 -52.472,-42.418 v1(-46.355,-42.418) ; v1(-25.146,-23.495) -24.26,-23.495 R17.2 T2.3 ; v1(-2.798,17.526) -2.798,21.844 ; 1.016,-38.862 1.016,-17.526 1.016,-8.89 v1(-0.381,-7.493) v1(-0.381,-5.461) v1(-0.381,-3.556) v1(2.032,-3.556) ; R9.2 R10.2 R11.2 v1(13.237,-64.77) ; U8.3 9.289,21.481 9.652,21.844 ; v1(10.033,-40.386) 11.938,-38.481 11.938,-34.431 ; v1(19.177,-63.5) 20.955,-61.722 25.781,-61.722 31.877,-55.626 31.877,-36.068
  Bottom Layer w1.5: -66.793,-9.994 -66.753,-10.033 ; J12.2 -49.053,-21.494 -49.053,-20.478 -43.276,-14.701 -42.671,-14.701 J20.1 -42.575,-10.033 J19.1 ; J14.1 43.561,-5.334 45.819,-7.592 45.819,-18.642 43.475,-20.986 41.244,-20.986 J11.1
  Bottom Layer w2: -64.068,-21.356 -63.834,-21.59 J12.2 ; -60.927,-29.128 -60.845,-29.21 J13.2 ; J22.2 -31.496,-60.325 -34.541,-57.28 -34.541,-53.851 j18.2 -35.306,-45.974 -33.56,-44.228 -20.701,-44.228 ; T2.3@-23.757,-27.438 -21.938,-27.438 -20.701,-28.675 -20.701,-44.228 ; U14.4@-6.763,-44.989 U14.4@-7.524,-44.228 ; -6.702,-37.465 -7.874,-38.637 -7.874,-43.878 U14.4@-7.524,-44.228 ; -6.702,-37.465 -0.381,-37.465 1.016,-38.862 J5.1 ; v1(10.16,-28.702) 10.16,-33.556 11.035,-34.431 11.938,-34.431 U9.9 17.353,-35.782 27.527,-35.782 U2.2 31.877,-36.068 ; J17.1 J16.1 J15.1 J14.1 ; J8.1 J9.1 J10.1 36.068,-22.225 U5.2 36.03,-26.2 36.03,-27.851 31.877,-32.004 31.877,-36.068 ; J1.2 34.25,-36.068 31.877,-36.068 ; -20.701,-44.228 U14.4@-7.524,-44.228
  Bottom Layer w2.5: v1(-21.412,3.505) -21.412,21.92
  Bottom Layer w3: C30.1@-62.473,-1.822 cw(c0,0) C29.1@-59.769,18.273 ; C30.1@-62.234,-1.778 -63.479,-5.177 -67.184,-6.895 ccw(c-0.037,0.005) -41.875,-52.965 ; C29.1@-59.436,18.923 -56.515,21.844 -35.839,21.844 ; v1(-45.339,3.302) -45.339,21.717 ; -41.656,-53.213 j18.2@-35.433,-53.213 ; v1(-35.839,3.429) -35.839,21.844 ; v1@-30.734,3.607 v1@-30.734,5.791 ; v1@-30.734,6.147 -30.734,21.844 ; v1(21.082,3.429) 21.082,21.844 ; v1(30.584,3.533) 30.584,21.948 ; v1(35.179,3.429) 35.179,21.844 ; v1(44.679,3.404) 44.679,21.819 ; C26.1 56.261,21.844 35.179,21.844 ; C26.1@59.589,18.419 cw(c2.328,-0.068) C31.1@62.473,-1.822 ; -35.839,21.844 -30.734,21.844 ; -30.734,21.844 -2.798,21.844 9.652,21.844 21.082,21.844 ; 21.082,21.844 35.179,21.844
  other v1: -1.048,-67.907 -11.048,-63.907 -3.048,-63.907 20.952,-63.907 24.952,-63.907 -33.048,-59.907 -1.048,-59.907 18.952,-59.907 30.952,-59.907 -39.048,-55.907 -23.048,-55.907 28.952,-55.907 32.952,-55.907 36.952,-55.907 -45.048,-51.907 -41.048,-51.907 18.952,-51.907 22.952,-51.907 30.952,-51.907 34.952,-51.907 38.952,-51.907 42.952,-51.907 24.952,-47.907 36.952,-47.907 40.952,-47.907 44.952,-47.907 48.952,-47.907 -6.985,-45.212 -21.048,-43.907 14.952,-43.907 22.952,-43.907 38.952,-43.907 42.952,-43.907 46.952,-43.907 50.952,-43.907 -51.048,-39.907 -47.048,-39.907 -23.048,-39.907 -19.048,-39.907 -15.048,-39.907 -11.048,-39.907 0.952,-39.907 16.952,-39.907 20.952,-39.907 24.952,-39.907 52.952,-39.907 -53.048,-35.907 -13.048,-35.907 -9.048,-35.907 -1.048,-35.907 10.952,-35.907 14.952,-35.907 18.952,-35.907 22.952,-35.907 30.952,-35.907 54.952,-35.907 -55.048,-31.907 -35.048,-31.907 -11.048,-31.907 52.952,-31.907 56.952,-31.907 -57.048,-27.907 -53.048,-27.907 -41.048,-27.907 -37.048,-27.907 -33.048,-27.907 -5.048,-27.907 -1.048,-27.907 10.952,-27.907 26.952,-27.907 30.952,-27.907 42.952,-27.907 46.952,-27.907 58.952,-27.907 -59.048,-23.907 -55.048,-23.907 -19.048,-23.907 24.952,-23.907 28.952,-23.907 44.952,-23.907 48.952,-23.907 56.952,-23.907 60.952,-23.907 -61.048,-19.907 -57.048,-19.907 -53.048,-19.907 -37.048,-19.907 -13.048,-19.907 18.952,-19.907 46.952,-19.907 50.952,-19.907 54.952,-19.907 58.952,-19.907 62.952,-19.907 -59.048,-15.907 -55.048,-15.907 24.952,-15.907 56.952,-15.907 64.952,-15.907 -61.048,-11.907 -45.048,-11.907 66.952,-11.907 60.952,-7.907 64.952,-7.907 -61.048,-3.907 -45.048,-3.907 62.952,-3.907 40.952,0.093 60.952,0.093 -61.048,4.093 -33.048,4.093 18.952,4.093 46.952,4.093 62.952,4.093 -35.839,4.699 21.082,4.699 -35.839,5.969 21.082,5.969 -11.048,8.093 -7.048,8.093 12.952,8.093 16.952,8.093 -61.048,12.093 -45.048,12.093 -33.048,12.093 18.952,12.093 34.952,12.093 46.952,12.093 54.952,12.093 58.952,12.093 62.952,12.093 -59.048,16.093 -55.048,16.093 -31.048,16.093 -3.048,16.093 0.952,16.093 20.952,16.093 32.952,16.093 56.952,16.093 60.952,16.093
ID: R4.1 R8.2 U1.38 | length 5.6
  Top Layer w0.25: R8.2 -8.038,-1.868 -7.276,-1.868 -6.394,-2.75 -4.825,-2.75 U1.38
  Top Layer w1: R8.2@-8.255,-1.231 R4.1@-8.255,-0.127
IN1: U1.28 U3.13 | length 66.8
  Top Layer w0.25: U3.13 -42.164,7.874 -40.267,5.977 -40.267,-2.405 -39.895,-2.777 -31.894,-2.777 -31.242,-3.429 -14.914,-3.429 -14.106,-2.621 -14.106,1.416 -13.617,1.905 -7.349,1.905 -4.682,4.572 0.508,4.572 1.25,3.83 U1.28
IN2: U1.27 U4.13 | length 53.1
  Top Layer w0.25: U4.13 -27.686,7.874 -26.162,6.35 -26.162,-2.286 -25.519,-2.929 -15.121,-2.929 -14.622,-2.43 -14.622,1.607 -13.824,2.405 -7.556,2.405 -4.889,5.072 -1.063,5.072 0.715,5.072 1.75,4.037 U1.27
IN3: U1.26 U7.13 | length 45.7
  Top Layer w0.25: U1.26@2.25,-1.016 2.25,3.973 3.341,5.064 9.85,5.064 17.216,-2.302 25.064,-2.302 25.908,-1.458 25.908,6.223 24.257,7.874 U7.13
IN4: U1.25 U6.13 | length 50.1
  Top Layer w0.25: U1.25 2.75,3.766 3.548,4.564 9.643,4.564 17.009,-2.802 31.756,-2.802 32.893,-1.665 32.893,7.366 33.401,7.874 U6.13
MUX_ADD1: J19.3 J20.3 U1.20 | length 90.7
  Top Layer w0.25: U1.20 8.568,-4.25 10.795,-6.477 v1(10.795,-9.017)
  Top Layer w0.5: v1(-0.138,-23.495) 10.287,-23.495 11.938,-21.844 11.938,-18.161 10.882,-17.105 10.882,-16.821 v1(10.825,-16.764)
  Bottom Layer w0.5: J20.3 -37.575,-17.162 -36.588,-18.149 -24.835,-18.149 -18.763,-12.077 -15.705,-12.077 -4.287,-23.495 v1(-0.138,-23.495) ; v1(10.825,-16.764) v1@10.825,-9.047
  Bottom Layer w1: J20.3 J19.3
MUX_ADD2: J19.4 J20.4 U1.19 | length 85
  Top Layer w0.25: U1.19 7.966,-4.75 10.016,-6.8 10.016,-9.938 v1(9.921,-10.033)
  Top Layer w0.5: v1(-0.762,-22.591) 9.921,-22.591 10.937,-21.575 10.937,-18.377 9.921,-17.361 v1(9.921,-15.748)
  Bottom Layer w0.5: J20.4 -35.075,-16.868 -34.544,-17.399 -25.146,-17.399 -19.074,-11.327 -15.395,-11.327 -4.131,-22.591 v1(-0.762,-22.591) ; v1(9.921,-15.748) v1(9.921,-10.033)
  Bottom Layer w1: J20.4 J19.4
MUX_ADD3: J19.5 J20.5 U1.41 | length 40.8
  Top Layer w0.25: J19.5 -32.575,-5.905 -31.615,-4.945 -12.128,-4.945 -10.044,-7.029 v1(-8.89,-7.029) ; v1(-7.366,-3.827) -7.217,-3.827 -6.794,-4.25 U1.41
  Bottom Layer w0.5: v1(-8.89,-7.029) -7.447,-5.586 -7.447,-3.908 v1(-7.366,-3.827)
  Bottom Layer w1: J20.5 J19.5
MUX_ADD4: J19.6 J20.6 U1.2 | length 40.1
  Top Layer w0.25: J19.6 -30.075,-6.199 -29.321,-5.445 -12.335,-5.445 -7.112,-10.668 -2.396,-10.668 -2.25,-10.522 U1.2
  Bottom Layer w1: J20.6 J19.6
NetC1_1: C1.1 U4.20 | length 5.9
  Top Layer w0.8: U4.20 v1(-27.94,-1.016)
  Bottom Layer w0.8: v1(-27.94,-1.016) -27.94,1.524 C1.1
NetC2_1: C2.1 U3.20 | length 5.9
  Top Layer w0.8: U3.20 v1(-42.291,-1.016)
  Bottom Layer w0.8: v1(-42.291,-1.016) -42.291,1.651 C2.1
NetC3_1: C3.1 U3.12 | length 7.3
  Top Layer w0.8: U3.12 -41.402,9.144 -39.535,7.277 v1(-39.535,6.604)
NetC3_2: C3.2 C5.2 J3.2 U3.11 | length 12.9
  Top Layer w0.8: U3.11 -42.799,10.414 v1(-42.545,10.668)
  Top Layer w1.5: v1(-42.545,10.668) -41.732,11.481 J3.2
  Bottom Layer w0.8: v1(-42.545,10.668) -42.514,10.637 -42.514,9.367 C5.2 C3.2
NetC4_1: C4.1 U4.12 | length 7.4
  Top Layer w0.8: U4.12 -26.797,9.144 -24.765,7.112 v1(-24.765,6.731)
NetC4_2: C4.2 C6.2 J4.2 U4.11 | length 13.1
  Top Layer w0.8: U4.11 -27.94,10.414 v1(-27.559,10.795)
  Top Layer w1.5: v1(-27.559,10.795) -27.305,11.049 J4.2
  Bottom Layer w0.8: C4.2 -27.559,6.858 v1(-27.559,10.795)
NetC5_1: C5.1 C7.1 J3.1 U3.9 | length 14.7
  Top Layer w0.8: v1(-38.481,4.699) -38.481,9.398 v1(-38.608,9.525) -38.227,9.144 U3.9
  Top Layer w1.5: J3.1 -39.192,10.109 v1(-38.608,9.525)
NetC6_1: C6.1 C8.1 J4.1 U4.9 | length 15
  Top Layer w0.8: v1(-24.13,9.906) -24.13,9.398 -23.876,9.144 ; v1(-24.003,4.191) -24.003,5.899 -23.622,6.28 -23.622,8.89 -23.876,9.144 ; U4.9 -23.876,9.144
  Top Layer w1.5: J4.1 -24.765,10.541 v1(-24.13,9.906)
NetC7_2: C7.2 U3.19 | length 6.8
  Top Layer w0.8: U3.19 -42.672,0.254 -42.164,0.762 v1(-42.164,4.191)
NetC8_2: C8.2 U4.19 | length 6.4
  Top Layer w0.8: U4.19 -28.956,0.254 -27.813,1.397 v1(-27.813,4.191)
NetC9_1: C9.1 U6.20 | length 6.3
  Top Layer w0.8: U6.20 v1(38.354,-1.016)
  Bottom Layer w0.8: C9.1 38.354,1.905 v1(38.354,-1.016)
NetC10_1: C10.1 U7.20 | length 6.9
  Top Layer w0.8: U7.20 v1(24.384,-1.016)
  Bottom Layer w0.8: v1(24.384,-1.016) C10.1@24.384,2.54
NetC11_1: C11.1 U6.12 | length 6.9
  Top Layer w0.8: U6.12 38.989,9.144 v1(41.148,6.985)
NetC11_2: C11.2 C13.2 J6.2 U6.11 | length 12.6
  Top Layer w0.8: U6.11 37.592,10.414 v1(38.1,10.922)
  Top Layer w1.5: v1(38.1,10.922) 38.481,11.303 J6.2
  Bottom Layer w0.8: v1(38.1,10.922) 38.1,6.985 C11.2
NetC12_1: C12.1 U7.12 | length 7.1
  Top Layer w0.8: U7.12 24.765,9.144 v1(27.178,6.731)
NetC12_2: C12.2 C14.2 J7.2 U7.11 | length 12
  Top Layer w0.8: U7.11 23.234,10.414 24.003,11.183 v1(24.003,11.303)
  Top Layer w1.5: v1(24.003,11.303) 24.638,11.938 J7.2
  Bottom Layer w0.8: v1(24.003,11.303) 24.003,7.747 C12.2@24.257,7.493
NetC13_1: C13.1 C15.1 J6.1 U6.9 | length 15
  Top Layer w0.8: J6.1 J6.1@41.148,16.002 ; v1(41.656,9.144) 42.291,9.144 ; v1(41.91,4.572) 42.291,4.953 42.291,9.144 ; U6.9 42.291,9.144
  Top Layer w1.5: J6.1@41.148,16.002 41.148,9.652 v1(41.656,9.144)
NetC14_1: C14.1 C16.1 J7.1 U7.9 | length 14.1
  Top Layer w0.8: v1(27.559,9.525) 28.232,8.852 28.232,5.118 v1(27.94,4.826) ; 27.94,9.144 28.232,9.144 U7.9
  Top Layer w1.5: J7.1 27.178,9.906 v1(27.559,9.525)
NetC15_2: C15.2 U6.19 | length 6.7
  Top Layer w0.8: U6.19 37.084,0.254 38.481,1.651 v1(38.481,4.445)
NetC16_2: C16.2 U7.19 | length 7
  Top Layer w0.8: U7.19 23.368,0.254 24.638,1.524 v1(24.638,4.445)
NetC20_2: C20.2 U12.3 U13.3 | length 39.4
  Top Layer w1: C20.2 -16.617,-41.913 -16.617,-43.327 -15.875,-44.069 -11.43,-44.069 -10.668,-44.831 -10.668,-49.276 -9.525,-50.419 -5.81,-50.419 -3.992,-52.237 -3.492,-52.237 U12.3@-3.442,-52.287 ; U12.3 U12.3@-3.442,-52.287 ; U13.3 -2.78,-39.314 -1.602,-39.314 -1.016,-39.9 -1.016,-51.651 -1.602,-52.237 -3.392,-52.237 U12.3@-3.442,-52.287
NetD1_1: D1.1 J5.4 | length 5.7
  Top Layer w2: J5.4 6.604,-49.213 D1.1@6.604,-49.149
NetD2_1: D2.1 R5.2 T1.4 | length 12.6
  Top Layer w3: R5.2 -29.591,-38.425 -24.257,-33.091 T1.4
  Bottom Layer w2: D2.1 -30.763,-40.64 -29.591,-39.468 R5.2
NetD3_1: D3.1 R18.1 | length 2
  Top Layer w1: D3.1 -42.247,-39.116 R18.1
NetD4_1: D4.1 j18.1 J22.1 | length 15.8
  Bottom Layer w2: j18.1 -27.94,-54.864 -25.019,-57.785 -25.019,-62.103 -23.025,-64.097 -20.701,-64.097 D4.1
NetD4_2: D4.2 SW5.2 SW6.2 | length 15.2
  Bottom Layer w2: D4.2 -20.701,-58.793 -20.455,-58.793 -17.876,-61.372 -14.701,-61.372 SW5.2 SW6.2
NetD5_1: D5.1 R19.1 | length 2.1
  Top Layer w1: D5.1 10.173,-45.276 12.128,-45.276 R19.1
NetJ12_1: J12.1 U10.1 | length 18.9
  Top Layer w2: J12.1 -48.514,-24.765 -34.199,-24.765 -33.027,-23.593 -33.027,-21.597 U10.1
NetJ21_2: J21.2 T3.4 | length 6.1
  Top Layer w2: J21.2 -10.033,14.351 T3.4
NetR3_2: R3.2 U8.1 | length 4.5
  Top Layer w0.8: U8.1 4.028,16.728 4.028,12.355 R3.2
NetR7_2: R7.2 R15.2 T1.1 | length 10.8
  Top Layer w0.5: R7.2 -22.122,-16.952 -21.529,-16.952 -20.148,-18.333 -19.513,-18.333 R15.2
  Top Layer w1: T1.1 -21.717,-21.691 -21.467,-21.441 -19.663,-21.441 -19.05,-20.828 R15.2
NetR14_1: R14.1 R17.1 T2.1 | length 6.9
  Bottom Layer w1.5: T2.1 -29.337,-24.376 -28.458,-23.498 R17.1 R14.1
NetR20_1: R20.1 R21.1 T3.1 | length 4.7
  Top Layer w1: T3.1 -2.667,12.446 R21.1 R20.1
NetSW6_1: SW6.1 U12.1 U14.1 | length 11.4
  Top Layer w2: U12.1 -8.242,-56.019 -7.492,-56.769 SW6.1
  Bottom Layer w1: SW6.1 -6.194,-56.769 -4.197,-54.772 U14.1
NetT2_4: T2.4 U10.4 | length 6.3
  Bottom Layer w2: U10.4 -32.924,-33.686 -26.945,-33.686 T2.4
NRST: R13.2 SW4.2 U1.7 | length 62.4
  Top Layer w0.25: U1.7 0.25,-14.728 1.016,-15.494 7.625,-15.494 7.879,-15.748 v1(8.028,-15.748)
  Bottom Layer w0.5: v1(8.028,-15.748) 7.986,-15.79 7.986,-32.84 7.874,-32.952 7.874,-49.921 15.181,-57.229 15.181,-57.657 15.181,-60.904 R13.2
  other v1: 15.239,-57.657
OSC_IN: C17.1 U1.5 U11.2 | length 21
  Top Layer w0.25: U11.2@-9.779,-15.621 -1.905,-15.621 ; C17.1 -3.177,-21.082 -2.024,-19.929 -2.024,-15.74 -1.905,-15.621 ; U1.5 -0.75,-14.775 -1.596,-15.621 -1.905,-15.621
OSC_OUT: C19.1 U1.6 U11.1 | length 25.7
  Top Layer w0.25: U11.1@-9.714,-24.765 -9.714,-23.942 -9.404,-23.632 -5.461,-23.632 ; C19.1 -5.461,-23.632 ; U1.6 -0.25,-14.982 -1.524,-16.256 -1.524,-20.136 -1.541,-20.153 -1.541,-21.988 -3.185,-23.632 -5.461,-23.632
PWM1: U1.45 U3.18 | length 55
  Top Layer w0.25: U3.18 -43.815,1.524 -43.053,2.286 -43.053,5.334 -42.545,5.842 -41.275,5.842 -40.767,5.334 -40.767,-3.683 -40.005,-4.445 -11.811,-4.445 -10.006,-6.25 U1.45
PWM2: U1.43 U4.18 | length 37.7
  Top Layer w0.25: v1(-32.639,-3.556) -31.822,-3.556 -31.435,-3.943 -9.814,-3.943 -8.507,-5.25 U1.43
  Top Layer w0.7: v1(-33.147,2.286) -33.12,2.286 -32.358,1.524 U4.18
  Bottom Layer w0.7: v1(-33.147,2.286) -33.147,2.259 -32.639,1.751 v1(-32.639,-3.556)
PWM3: U1.42 U7.18 | length 53.9
  Top Layer w0.25: v1(-11.572,-3.164) -11.558,-3.15 -9.89,-3.15 -8.29,-4.75 U1.42 ; v1(-11.572,3.184) -7.484,3.184 -5.096,5.572 10.049,5.572 17.423,-1.802 18.772,-1.802 19.304,-1.27 19.304,1.27 19.558,1.524 U7.18
  Bottom Layer w0.6: v1(-11.572,-3.164) v1(-11.572,3.184)
PWM4: U1.29 U6.18 | length 46.5
  Top Layer w0.25: v1(0.381,3.429) 0.381,3.377 0.75,3.008 U1.29 ; v1(3.81,3.429) 3.915,3.534 3.915,3.915 4.064,4.064 9.436,4.064 16.802,-3.302 31.963,-3.302 33.393,-1.872 33.393,1.143 33.774,1.524 U6.18
  Bottom Layer w0.6: v1(0.381,3.429) v1(3.81,3.429)
RCJ_COM: U1.40
RX: U1.30 U8.4 | length 29.4
  Top Layer w0.25: v1(-0.054,2.416) -0.054,2.267 0.25,1.963 U1.30
  Top Layer w0.5: v1(4.699,2.159) v1(10.033,2.159)
  Bottom Layer w0.5: v1(-0.054,2.416) 0.027,2.416 0.284,2.159 v1(4.699,2.159) ; v1(10.033,2.159) 10.033,9.652 12.573,12.192 12.573,15.723 11.938,16.358 U8.4
SCL: J1.3 J2.3 R1.1 U1.21 U2.5 U5.3 U9.5 | length 130.7
  Top Layer w0.25: U1.21 9.28,-3.75 14.478,-8.948 14.478,-10.033 v1(14.986,-10.541)
  Top Layer w0.5: U9.5 -16.088,-26.811 -15.213,-27.686 -9.951,-27.686 -7.042,-24.777 10.529,-24.777 v1@11.43,-23.876
  Top Layer w1: J2.3 40.426,-38.568 44.156,-38.568 R1.1
  Top Layer w1.5: U2.5 28.002,-43.498 30.57,-43.498 31.449,-42.619 31.449,-39.407 32.328,-38.528 J1.3 J2.3
  Bottom Layer w0.3: U5.3 U5.3@38.608,-25.448
  Bottom Layer w0.5: v1(11.684,-23.622) 13.335,-23.622 14.097,-22.86 14.097,-14.351 14.49,-13.958 14.986,-13.958 ; v1(14.986,-10.541) 14.986,-13.958 ; U5.3 38.058,-25.612 38.058,-15.243 36.773,-13.958 14.986,-13.958
  Bottom Layer w1: J1.3 36.117,-38.528 36.703,-37.942 36.703,-31.115 38.608,-29.21 U5.3
SDA: J1.4 J2.4 R2.1 U1.22 U2.6 U5.4 U9.6 | length 142
  Top Layer w0.25: U1.22 9.854,-3.25 15.45,-8.846 15.45,-9.354 v1(15.494,-9.398)
  Top Layer w0.5: U9.6 -16.116,-29.351 -15.213,-28.448 -9.652,-28.448 -6.731,-25.527 11.303,-25.527 13.193,-23.637 v1(13.193,-21.971)
  Top Layer w1: J2.4 40.446,-41.088 44.136,-41.088 R2.1
  Top Layer w1.5: U2.6 33.148,-46.227 34.29,-45.085 J1.4 J2.4
  Bottom Layer w0.5: v1(13.193,-21.971) 13.25,-21.914 13.25,-21.701 13.311,-21.641 13.311,-9.715 13.628,-9.398 15.546,-9.398 16.002,-9.854 16.002,-12.573 16.637,-13.208 37.084,-13.208 38.808,-14.932 38.808,-22.806 39.37,-23.368 40.513,-23.368 41.275,-24.13 U5.4@41.275,-26.543
  Bottom Layer w1: J2.4 40.221,-41.193 38.686,-41.193 38.1,-40.607 38.1,-32.258 41.148,-29.21 U5.4
SHOOT: R14.2 U1.4 | length 44
  Top Layer w0.25: v1(-12.7,-16.637) -12.7,-11.176 -12.065,-10.541 -8.382,-10.541 -7.842,-11.081 -7.842,-13.875 -6.985,-14.732 -1.651,-14.732 -1.25,-14.331 U1.4
  Bottom Layer w0.5: R14.2 -24.257,-18.631 -18.453,-12.827 -16.129,-12.827 -12.757,-16.199 -12.757,-16.58 v1(-12.7,-16.637)
SPIN: R20.2 U1.3 | length 41.4
  Top Layer w0.25: v1(-2.18,-12.933) -2.18,-12.785 -1.75,-12.355 U1.3
  Top Layer w0.6: v1(0.889,6.351) R20.2
  Bottom Layer w0.5: v1(-2.18,-12.933) -8.022,-12.933 -10.668,-10.287 -10.668,3.302 -8.128,5.842 0.38,5.842 v1(0.889,6.351)
SW1: R11.1 SW2.2 U1.39 | length 97.4
  Top Layer w0.25: v1(-8.509,-3.429) -8.429,-3.429 -8.048,-3.048 -6.858,-3.048 -6.656,-3.25 U1.39
  Top Layer w0.8: SW2.2 6.858,-56.515 v1(6.858,-54.483)
  Bottom Layer w0.5: v1(-8.509,-3.429) -8.509,3.34 -7.516,4.333 4.385,4.333 6.374,2.344 6.374,-50.697 8.509,-52.832 ; v1(6.858,-54.483) 8.509,-52.832 ; R11.1 10.983,-55.306 8.509,-52.832
SWCLK: J5.2 U1.37 | length 64.4
  Top Layer w0.25: v1(-4.699,3.175) -5.334,3.175 -6.858,1.651 -6.858,-1.452 -6.06,-2.25 U1.37
  Bottom Layer w0.5: v1(-4.699,3.175) -4.699,0.374 -2.202,-2.123 2.878,-2.123 3.374,-2.619 3.374,-43.362 2.523,-44.213 J5.2
SWIO: J5.3 U1.34 | length 61.5
  Top Layer w0.25: v1(-3.706,2.341) -3.683,2.341 -1.75,0.408 U1.34
  Bottom Layer w0.5: v1(-3.706,2.341) -3.706,0.442 -1.891,-1.373 3.189,-1.373 4.124,-2.308 4.124,-45.279 2.69,-46.713 J5.3
TX: U1.31 U8.5 | length 35.6
  Top Layer w0.25: v1(-1.016,3.429) -1.016,2.104 -0.25,1.338 U1.31
  Top Layer w0.5: v1(5.437,1.167) 10.611,1.167 10.656,1.213 10.992,1.213 v1(11.049,1.27)
  Bottom Layer w0.5: v1(-1.016,3.429) -0.959,3.372 -0.959,2.704 ; -0.958,2.703 -0.958,1.593 -0.508,1.143 5.413,1.143 v1(5.437,1.167) ; v1(11.049,1.27) 11.049,9.144 13.843,11.938 13.843,15.721 14.587,16.465 U8.5
VBOOST: D2.2 J13.1 R6.2 U10.5 | length 56.3
  Top Layer w0.5: U10.5 -38.989,-30.988 -37.719,-29.718 -31.623,-29.718 -30.607,-28.702 -30.607,-21.209 -25.654,-16.256 -25.654,-11.684 -24.829,-10.859 R6.2@-22.413,-10.859
  Bottom Layer w2: J13.1 -49.149,-35.306 -46.863,-37.592 -38.989,-37.592
  Bottom Layer w2.5: D2.2 -38.989,-37.592 U10.5
VCC: C18.2 C21.2 C22.2 C23.2 C24.2 C25.2 C30.2@46.609,-32.766 C31.2@44.196,-32.766 D1.2 J1.1 J2.1 J8.2 J9.2 J10.2 J11.2 J14.2 J15.2 J16.2 J17.2 J19.2 J20.2 R1.2 R2.2 R3.1 R4.2 R13.1 R19.2 SW1.1 SW1.2 SW2.1 SW3.1 U1.9 U1.24 U1.36 U1.48 U2.1 U3.2 U4.2 U5.1 U6.2 U7.2 U8.2 U9.10 U10.3 U13.2 U13.4 U14.3 | length 564
  Top Layer w0.25: U1.48 -2.924,-7.75 -1.651,-6.477 v1@1.25,-6.477 ; U1.36 -2.75,-2.584 -0.889,-4.445 1.25,-4.445 ; U1.9 v1@1.25,-6.477 ; U1.24 2.195,-2.25 1.25,-3.195 1.25,-4.445 ; v1@1.25,-6.477 1.25,-4.445
  Top Layer w0.8: U3.2 v1(-34.036,0.254) ; U4.2 v1(-18.415,0.254) ; v1(-13.208,0.254) -11.938,0.254 R4.2 ; U7.2 v1(32.114,0.254) ; U6.2 44.729,0.204 46.267,0.204 v1(46.344,0.127)
  Top Layer w1: v1(-5.08,-40.386) U13.2 U13.4 ; SW1.1 SW1.2 2.02,-64.047 2.725,-64.047 2.813,-64.135 6.481,-64.135 6.731,-64.385 SW2.1 10.922,-65.024 10.922,-62.484 11.811,-61.595 24.892,-61.595 26.924,-59.563 26.924,-52.832 18.115,-44.023 18.115,-41.786 C21.2 15.115,-41.786 15.112,-41.783 R19.2 12.192,-39.067 11.606,-38.481 7.112,-38.481 6.985,-38.608 ; C18.2 6.985,-37.211 ; C23.2 6.943,-34.586 6.985,-34.544 ; U8.2 6.604,16.728 6.832,16.5 6.832,15.012 7.62,14.224 R3.1 ; J14.2 42.037,-7.874 42.418,-8.255 C24.2 C25.2 47.498,-10.717 48.084,-11.303 58.596,-11.303 59.182,-11.889 59.182,-15.748 60.093,-16.659 C22.2 ; J2.1 42.418,-33.528 42.93,-33.016 43.946,-33.016 C31.2@44.196,-32.766 ; C31.2@44.071,-32.766 C31.2@44.196,-32.766 ; R2.2 48.002,-40.898 49.071,-40.898 49.657,-40.312 49.657,-38.481 ; R1.2 49.53,-38.608 49.657,-38.481 ; C31.2@44.196,-32.766 46.609,-32.766 48.895,-32.766 49.657,-33.528 49.657,-38.481
  Top Layer w2: U13.4 -5.005,-32.814 -3.731,-32.814 -2.794,-31.877 v1(2.273,-31.877) ; v1@2.286,-31.877 2.3,-31.891 7.112,-31.891 ; 6.943,-34.586 6.943,-32.06 7.112,-31.891 ; D1.2 6.985,-38.608 6.985,-37.211 6.985,-34.544 ; J17.2 J16.2 J15.2 J14.2 ; J8.2 J9.2 31.75,-18.542 ; J1.1@33.528,-33.528 U2.1 20.32,-33.528 18.683,-31.891 U9.10 7.112,-31.891 ; J2.1 J1.1 33.528,-32.766 U5.1 33.49,-26.124 33.49,-23.711 31.75,-21.971 31.75,-18.542 ; J11.2 J10.2 31.75,-18.542
  Bottom Layer w0.8: -34.036,-5.08 v1(-34.036,0.254) ; v1(-18.415,0.254) v1(-13.208,0.254) ; 32.073,-2.667 32.114,-2.626 v1(32.114,0.254)
  Bottom Layer w1: U14.3 -8.757,-50.975 -7.185,-49.403 -2.872,-49.403 -2.286,-48.817 -2.286,-40.972 -2.872,-40.386 v1(-5.08,-40.386) ; SW1.1 SW1.2 1.727,-65.989 2.54,-66.802 14.656,-66.802 15.241,-66.216 15.241,-65.02 R13.1 ; v1(1.27,-6.477) 2.273,-7.48 v1(2.273,-31.877)
  Bottom Layer w1.5: U10.3 -44.767,-33.591 -44.767,-28.257 -40.075,-23.565 J20.2 J19.2 -39.979,-7.524 -39.979,-5.959 -39.101,-5.08 -34.036,-5.08 -19.939,-5.08 -18.415,-3.556 v1(-18.415,0.254) -18.415,9.916 -17.536,10.795 6.64,10.795 ; U8.2 6.64,10.795 ; J17.2 20.605,-7.778 18.827,-7.778 17.78,-6.731 17.78,-2.667 ; J14.2 42.682,-7.874 43.561,-8.753 43.561,-17.526 42.641,-18.446 41.244,-18.446 J11.2 ; v1(46.344,0.127) 46.609,-0.138 46.609,-1.788 45.73,-2.667 32.073,-2.667 17.78,-2.667 ; 6.64,10.795 6.64,5.044 8.382,3.302 8.382,-1.016 10.033,-2.667 17.78,-2.667
  Bottom Layer w2: J17.2 J16.2 J15.2 J14.2 ; J8.2 J9.2 J10.2
pads on no net: ?. ?.1 SW5.3 SW6.3 U1.1 U2.3 U2.4 U2.7 U3.3 U3.8 U4.3 U4.8 U5. U6.3 U6.8 U7.3 U7.8 U8.6 U9.1 U9.2 U9.3 U9.4 U9.7 U9.8 U9.11 U9.12 U9.13 U9.14 U9.15 U9.16 U9.17 U9.18 U10.2
copper on no net: | length 1053.9
  Top Layer w0.3: -65.781,23.941 ccw(c-0.003,0) 65.776,23.941 -65.781,23.941 ; -59.182,-11.303 -59.182,11.176 -48.133,11.176 -48.133,-11.303 -59.182,-11.303 ; 49.149,-9.906 49.149,10.033 58.987,10.033 58.987,-9.906 49.149,-9.906
  Bottom Layer w0.3: -65.778,23.94 ccw(c0,-0.002) 65.778,23.94 -65.778,23.94 ; -59.182,-11.303 -48.133,-11.303 -48.133,11.176 -59.182,11.176 -59.182,-11.303 ; 49.149,-9.906 49.149,10.033 58.987,10.033 58.987,-9.906 49.149,-9.906

## Polygon pours and split planes (outlines as drawn)
GND on Bottom Layer "GND_L02_P001" (solid, pour order 1): -65.92,23.993 ccw(c0,0) 70.15,0 ccw(c0,0) 65.92,23.993 ccw(c65.778,23.941) 65.778,24.092 -65.778,24.092 ccw(c-65.778,23.941)
GND on Top Layer "GND_L01_P000" (solid, pour order 0): -65.92,23.993 ccw(c0,0) 70.15,0 ccw(c0,0) 65.92,23.993 ccw(c65.778,23.941) 65.778,24.092 -65.778,24.092 ccw(c-65.778,23.941)

## Silkscreen, mask and mechanical layers (free items; w line width, h text height)
Top Overlay:
  drawing of 44 lines, arcs and shapes, not listed
  text "ML1" at -37.592,22.606 h4 r180
  text "ML2" at -22.86,22.606 h4 r180
  text "MR2" at 29.464,22.606 h4 r180
  text "MR1" at 43.307,22.606 h4 r180
  text "SPIN" at -13.335,22.573 h3 r180
  text "Bluetooth" at 16.256,22.563 h3 r180
  text "STMicroelectronics" at 7.113,-7.61 h1.2
  text "ADC" at 48.514,-21.163 h4
  text "{" at 47.117,-21.214 h15
  text "SHOOT" at -64.96,-23.699 h4
  text "CAP" at -59.817,-31.704 h4
Bottom Overlay:
  drawing of 31 lines, arcs and shapes, not listed
  text "RCJ SOCCER 2025" at 12.142,-7.436 h3
  text "DANGER" at -52.391,-29.328 h2.5
  text "HIGH VOLTAGE" at -52.518,-30.993 h1.4
  text "I2C" at 54.229,-38.562 h4
  text "{" at 46.99,-40.562 h20
  text "PB15 -> ML1      PB8 -> PWM1 / PB14 -> ML2      PB7 -> PWM2 / PB13 -> MR2     PB6 -> PWM3 / PB12 -> MR1     PA8 -> PWM4 /  / PC14 -> Spin     / PC15 -> SHOOT / PB9 -> BOOST PWM / PB3 -> SW1 / PA15 -> ROBOT ID / PA12 -> DIP1 / PA11 -> DIP2 /  /  / PC13 -> MUX Address 4 / PB5   -> MUX Address 3 / PB1   -> MUX Address 2 / PB0   -> MUX Address 1" at 12.065,-41.656 h2
Top Solder:
  lines w0.3: -65.778,23.941 ccw(c0,0) 65.778,23.941 -65.778,23.941 ; -59.182,-11.303 -59.182,11.176 -48.133,11.176 -48.133,-11.303 -59.182,-11.303 ; 49.149,-9.906 58.987,-9.906 58.987,10.033 49.149,10.033 49.149,-9.906
Bottom Solder:
  lines w0.3: -65.778,23.941 ccw(c0,0) 65.778,23.941 -65.778,23.941 ; -59.182,-11.303 -59.182,11.176 -48.133,11.176 -48.133,-11.303 -59.182,-11.303 ; 49.149,-9.906 49.149,10.033 58.987,10.033 58.987,-9.906 49.149,-9.906
Mechanical 1:
  lines w0.3: -65.776,23.941 ccw(c0.002,0) 65.781,23.941 -65.776,23.941 ; -59.182,-11.303 -48.133,-11.303 -48.133,11.176 -59.182,11.176 -59.182,-11.303 ; 49.149,-9.906 49.149,10.033 58.987,10.033 58.987,-9.906 49.149,-9.906

## Text inside footprints (layer, text, board x,y; h text height)
C26: Top Overlay "-" at 58.674,15.748 h1.52; Top Overlay "+" at 64.008,15.748 h1.52
C27: Top Overlay "-" at 60.833,5.461 h1.52; Top Overlay "+" at 66.167,5.461 h1.52
C28: Top Overlay "-" at -60.833,11.43 h1.52 r180; Top Overlay "+" at -66.167,11.43 h1.52 r180
C29: Top Overlay "-" at -58.674,21.59 h1.52 r180; Top Overlay "+" at -64.008,21.59 h1.52 r180
C30: Top Overlay "-" at -61.468,1.143 h1.52 r180; Top Overlay "+" at -66.802,1.143 h1.52 r180
C31: Top Overlay "-" at 61.595,-4.953 h1.52; Top Overlay "+" at 66.929,-4.953 h1.52
j18: Top Overlay "+" at -23.622,-53.594 h1.52 r270; Top Overlay "-" at -40.767,-53.594 h1.52 r270
J22: Top Overlay "-" at -28.321,-62.992 h1.52 r270; Top Overlay "+" at -25.781,-62.992 h1.52 r270
U5: Top Overlay "VCC" at 32.803,-28.983 h0.5; Top Overlay "GND" at 35.343,-28.983 h0.5; Top Overlay "SCL" at 37.883,-28.983 h0.5; Top Overlay "SDA" at 40.423,-28.983 h0.5; Top Overlay "OLED SH1106" at 18.601,-61.161 h0.8
U8: Top Overlay "HC05" at 7.804,11.718 h1.52
U9: Top Overlay "P0" at -13.79,-16.979 h0.8; Top Overlay "P1" at -13.79,-19.519 h0.8; Top Overlay "P2" at -13.79,-22.059 h0.8; Top Overlay "P3" at -13.79,-24.599 h0.8; Top Overlay "3.3V" at -13.79,-34.759 h0.8; Top Overlay "P6" at -13.79,-32.219 h0.8; Top Overlay "P7" at 12.33,-29.679 h0.8; Top Overlay "P8" at 12.33,-27.139 h0.8; Top Overlay "P9" at 12.33,-24.599 h0.8; Top Overlay "SYN" at 11.53,-22.059 h0.8; Top Overlay "BOOT" at 10.731,-19.519 h0.8; Top Overlay "RST" at 11.53,-16.979 h0.8; Top Overlay "P4 (SCL)" at -13.79,-27.266 h0.8; Top Overlay "P5 (SDA)" at -13.79,-29.679 h0.8; Top Overlay "VIN" at 11.664,-32.219 h0.8; Top Overlay "GND" at 11.53,-34.759 h0.8